# Altium PCB Current_Transducer.PcbDoc
Units mm, origin at the board's own origin, x right, y up, seen from the top; angles counter-clockwise.
Board outline 230 x 35 mm, 2 copper layers (Top Layer, Bottom Layer); 44 components, 17 nets, 113 pads, 2 vias.
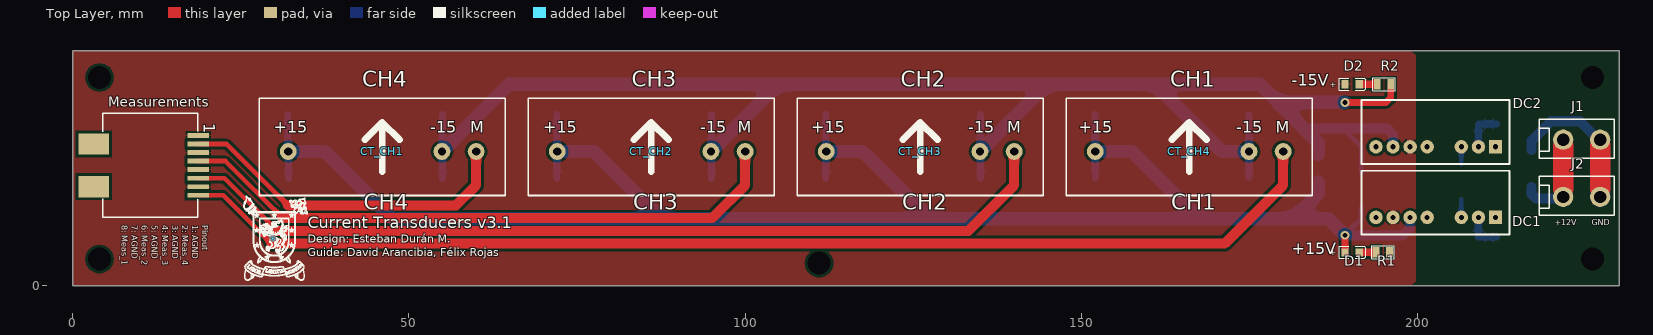
[diagram p0: Top Layer view]
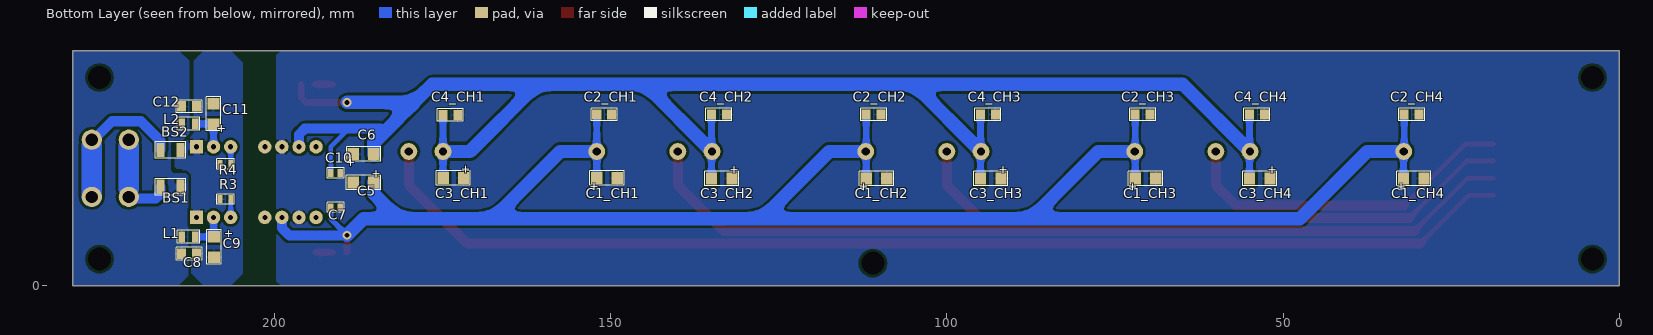
[diagram p1: Bottom Layer view, seen from below]
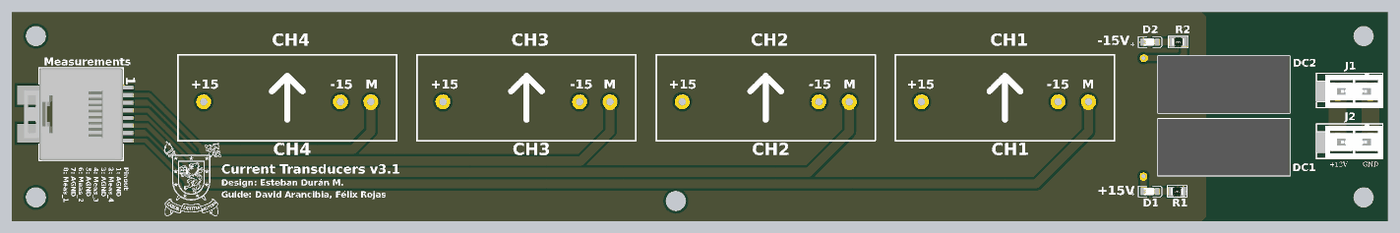
[diagram p2: 3D render of the assembled board from above, using the file's embedded part models]
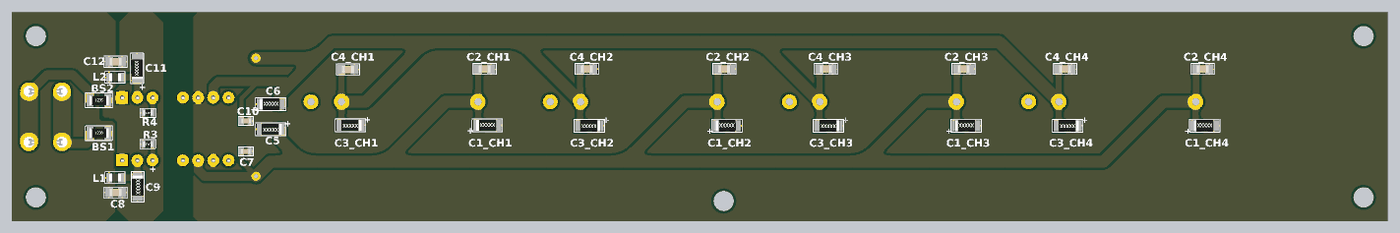
[diagram p3: 3D render of the assembled board from below, using the file's embedded part models]

## Layer stack, top to bottom
Top Solder: solder mask 0.0102, Solder Resist, Dk 3.5
Top Layer: signal copper 0.0356
Dielectric1: dielectric 0.32, FR-4, Dk 4.8
Bottom Layer: signal copper 0.0356
Bottom Solder: solder mask 0.0102, Solder Resist, Dk 3.5

## Board outline
230,35 230,0 0,0 0,35

## Design rules (kind name [scope] priority, off if disabled: settings)
Clearance [All] p1: gap=0.4
ComponentClearance [All] p1: gap=0.254 collisioncheckmode=3 verticalgap=0 showdistances=FALSE
Height [All] p1: minheight=0 maxheight=50 prefheight=12.7
HoleSize [All] p1: absolutevalues=TRUE maxlimit=100 minlimit=0.025 maxpercent=80.000 minpercent=20.000
PolygonConnect PolygonConnect_1 [All vs HasFootprint('Conector tipo ATX Wurth 2 posiciones') OR HasFootprint('DC/DC 15V 5W') OR HasFootprint('RES_1206')] p1: connectstyle=Relief reliefconductorwidth=1 reliefentries=4 polygonreliefangle="90 Angle" airgapwidth=0.254
PolygonConnect [All] p2: connectstyle=Relief reliefconductorwidth=0.254 reliefentries=4 polygonreliefangle="90 Angle" airgapwidth=0.254
RoutingVias [All] p1: holewidth=0.711 width=1.27 viastyle="Through Hole" minholewidth=0.711 minwidth=1.27 maxholewidth=0.711 maxwidth=1.27
SilkToSilkClearance [All] p1: silktosilkclearance=0
SilkToSolderMaskClearance SilkscreenOverComponentPads [IsPad] p1: minsilkscreentomaskgap=0 clearancetoexposedcopper=TRUE
SolderMaskExpansion [All] p1: expansion=0.102
Width [All] p1: maxlimit=3 minlimit=0.254 preferedwidth=1.5 minimp=50.000000 maximp=50.000000 favimp=50.000000
25 further rules are at their usual default settings.

## Classes and differential pairs
channel class Transducer: CH1 CH2 CH3 CH4 CH5 CH6 CH7 CH8 CH9 CH10
net class MEDICION[1..4]: MEDICION1 MEDICION2 MEDICION3 MEDICION4
component class CH1: C1_CH1 C2_CH1 C3_CH1 C4_CH1 CT_CH1
component class CH2: C1_CH2 C2_CH2 C3_CH2 C4_CH2 CT_CH2
component class CH3: C1_CH3 C2_CH3 C3_CH3 C4_CH3 CT_CH3
component class CH4: C1_CH4 C2_CH4 C3_CH4 C4_CH4 CT_CH4
component class "Current Measurement": * C5 C6 Measurements
component class PowerSupply: BS1 BS2 C7 C8 C9 C10 C11 C12 D1 D2 DC1 DC2 J1 J2 L1 L2 R1 R2 R3 R4

## Components (designator, comment, footprint, x,y, rotation, side; value= is the part's Value field where it differs from the comment)
* "LOGO USACH" "Logo Usach" 29.9,6.8 r0 top
BS1 "Ferrite bead" RES_1206 216.96,14.75 r270 bottom
BS2 "Ferrite bead" RES_1206 216.96,20.25 r270 bottom
C1_CH1 "1uF" "CAP_1206 Tantalio" 150.535,16.06 r90 bottom (schematic designator C1)
C1_CH2 "1uF" "CAP_1206 Tantalio" 110.475,16 r90 bottom (schematic designator C1)
C1_CH3 "1uF" "CAP_1206 Tantalio" 70.475,16 r90 bottom (schematic designator C1)
C1_CH4 "1uF" "CAP_1206 Tantalio" 30.575,16 r90 bottom (schematic designator C1)
C2_CH1 "100nF" CAP_0805 152.06,25.5 r90 bottom (schematic designator C2)
C2_CH2 "100nF" CAP_0805 112,25.5 r90 bottom (schematic designator C2)
C2_CH3 "100nF" CAP_0805 72,25.5 r90 bottom (schematic designator C2)
C2_CH4 "100nF" CAP_0805 32,25.5 r90 bottom (schematic designator C2)
C3_CH1 "1uF" "CAP_1206 Tantalio" 173.395,16.08 r270 bottom (schematic designator C3)
C3_CH2 "1uF" "CAP_1206 Tantalio" 133.475,16 r270 bottom (schematic designator C3)
C3_CH3 "1uF" "CAP_1206 Tantalio" 93.475,16 r270 bottom (schematic designator C3)
C3_CH4 "1uF" "CAP_1206 Tantalio" 53.475,16 r270 bottom (schematic designator C3)
C4_CH1 "100nF" CAP_0805 172.72,25.42 r270 bottom (schematic designator C4)
C4_CH2 "100nF" CAP_0805 132.8,25.5 r270 bottom (schematic designator C4)
C4_CH3 "100nF" CAP_0805 92.8,25.5 r270 bottom (schematic designator C4)
C4_CH4 "100nF" CAP_0805 52.8,25.5 r270 bottom (schematic designator C4)
C5 "10uF" "CAP_1206 Tantalio" 186.725,15.4 r270 bottom
C6 "10uF" "CAP_1206 Tantalio" 186.725,19.6 r90 bottom
C7 "0.33uF" CAP_0603 191.6,11.7 r90 bottom
C8 "4.7uF" CAP_0805 213.78,4.8 r90 bottom
C9 "2.2uF" "CAP_1206 Tantalio" 208.98,5.8 r180 bottom
C10 "0.33uF" CAP_0603 190.2,16.8 r270 bottom
C11 "2.2uF" "CAP_1206 Tantalio" 209.08,25.6 r0 bottom
C12 "4.7uF" CAP_0805 213.78,26.7 r90 bottom
CT_CH1 "Current Sensor 50A 1 Channel Hall Effect, Closed Loop Bidirectional Module" "LEM_LA 55-P" 60,20 r180 top (schematic designator CT)
CT_CH2 "Current Sensor 50A 1 Channel Hall Effect, Closed Loop Bidirectional Module" "LEM_LA 55-P" 100,20 r180 top (schematic designator CT)
CT_CH3 "Current Sensor 50A 1 Channel Hall Effect, Closed Loop Bidirectional Module" "LEM_LA 55-P" 140,20 r180 top (schematic designator CT)
CT_CH4 "Current Sensor 50A 1 Channel Hall Effect, Closed Loop Bidirectional Module" "LEM_LA 55-P" 180,20 r180 top (schematic designator CT)
D1 "LED" LED_0805_GREEN 190.25,5 r0 top
D2 "LED" LED_0805_GREEN 190.25,30 r0 top
DC1 "MEAN WELL USA" "DC/DC 15V 5W" 211.58,10.2 r180 top
DC2 "MEAN WELL USA" "DC/DC 15V 5W" 211.58,20.7 r180 top
J1 "Conector tipo ATX 2pos_1" "Conector tipo ATX Wurth 2 posiciones - (5.5mm)" 224.4,21.75 r270 top
J2 "Conector tipo ATX 2pos_1" "Conector tipo ATX Wurth 2 posiciones - (5.5mm)" 224.4,13.25 r270 top
L1 "12uH" INDUCTOR_0805 214.45,8.27 r90 bottom
L2 "12uH" INDUCTOR_0805 214.45,25.07 r90 bottom
Measurements "RJ-45 Modulo" "RJ45 1 Modulo SMD" 18.7,22.39 r270 top
R1 "5.6K" RES_0805 195.825,5 r270 top
R2 "5.6K" RES_0805 194,30 r90 top
R3 "DNP" RES_0603 206.48,12.9 r270 bottom
R4 "DNP" RES_0603 206.48,18.15 r270 bottom

## Footprints (in the part's own frame and the unit in brackets; to place one, negate y for a bottom-side part, rotate by r counter-clockwise, add the part's x,y. Pads: shape width x height; smd on the part's side, far side on the other; paste and mask are expansions set on the pad)
CAP_0603 [mm] "CAP CER 0603"
  rect 1.2x0.8 smd: 1(0,0) 2(0,-1.4)
  silkscreen extent -0.76,-1.96 0.76,0.56, body extent -0.39,-1.45 0.41,0.15, height 0.4
CAP_0805 [mm] "CAP CER 0805"
  rect 1.55x1.35 smd: 1(0,0) 2(0,-2.2)
  silkscreen extent -0.94,-3.04 0.94,0.84, body extent -0.62,-2.1 0.63,-0.1, height 0.6
"CAP_1206 Tantalio" [mm] "Case A"
  rect 1.8x1.7 smd: 1(0,1.525) 2(0,-1.525)
  silkscreen extent -1.07,-2.55 1.08,2.54, body extent -0.95,-1.53 0.95,1.88, height 1.84
"Conector tipo ATX Wurth 2 posiciones - (5.5mm)" [mm] "Vertical Pitch 5.5 mm (64900221122)"
  round 3 hole 1.8: 1(0,2.75) 2(0,-2.75)
  silkscreen extent -3.05,-6.3 2.75,4.8, body extent -3.05,-6.3 2.75,4.8, height 12.9
"DC/DC 15V 5W" [mm] "Marca MEAN WELL (SPB05A-15)"
  rect 2x2 hole 0.762: 1(0,0)
  round 2 hole 0.762: 2(2.54,0) 3(5.08,0) 6(12.7,0) 7(15.24,0) ""(10.16,0) ""(17.78,0)
  silkscreen extent -2.07,-6.95 19.93,2.55, body extent -2.07,-6.95 19.93,2.55, height 12.3
INDUCTOR_0805 [mm] "Wurth"
  rect 1.6x1 smd: 1(-0.97,-0.67) 2(-0.97,-2.67)
  silkscreen extent -1.94,-3.33 0,0, body extent -1.57,-2.67 -0.37,-0.67, height 1
LED_0805_GREEN [mm] "Chip LED, 2-Leads, Body 2.0x1.3mm, IPC Medium Density"
  rect 1.1x1.2 smd: 1(-1.05,0) 2(1.05,0)
  silkscreen extent -1.91,-0.89 2.03,0.89, body extent -1,-0.63 1,0.62, height 0.68
"LEM_LA 55-P" [mm] "SENSOR CURRENT 50A TH"
  round 2.5 hole 1.25: 1(0,0) 2(5.08,0) 3(27.94,0)
  silkscreen extent -4.33,-7.9 32.27,6.55, body extent -4.33,-7.9 32.27,6.55, height 27.2
"Logo Usach" [mm] "9.5 x 12.6 mm"
  silkscreen extent -4.53,-5.94 5.09,6.59
RES_0603 [mm] "RES 0603"
  rect 1.2x0.7 smd: 1(0,0) 2(0,-1.6)
  silkscreen extent -0.76,-2.11 0.76,0.51, body extent -0.45,-1.59 0.45,0.01, height 0.5
RES_0805 [mm] "RES 0805"
  rect 1.6x1 smd: 1(0,0) 2(0,-2)
  silkscreen extent -0.97,-2.66 0.97,0.67, body extent -0.61,-2 0.64,0, height 0.5
RES_1206 [mm] "RES 1206"
  rect 2.1x1.2 smd: 1(0,0) 2(0,3)
  silkscreen extent -1.22,-0.76 1.22,3.76, body extent -0.78,-0.1 0.82,3.1, height 0.6
"RJ45 1 Modulo SMD" [mm] "smd WURTH"
  rect 0.7x3.2 smd: 1(0,0) 2(1.27,0) 3(2.54,0) 4(3.81,0) 5(5.08,0) 6(6.35,0) 7(7.62,0) 8(8.89,0)
  rect 3.15x4.5 smd: ""(1.27,-15.55) ""(7.62,-15.55)
  silkscreen extent -3.31,-14.2 12.2,-0.1, body extent -3.32,-16.64 12.23,1.36, height 12.7

## Part data
BS1 BS2: library part Bead, "4A"
C1_CH1 C1_CH2 C1_CH3 C1_CH4 C3_CH1 C3_CH2 C3_CH3 C3_CH4 C5 C6 C9 C11: library part "Cap Tantalio 1206", "Capacitor Tantalio"
C2_CH1 C2_CH2 C2_CH3 C2_CH4 C4_CH1 C4_CH2 C4_CH3 C4_CH4: library part CAP_0805, "Capacitor"
C7 C10: library part Cap_0603, "Capacitor Ceramic"
C8 C12: library part Cap_0805, "Capacitor"
CT_CH1 CT_CH2 CT_CH3 CT_CH4: library part "LEM_LA 55-P", "LA 55-P"
D1 D2: library part LED2, "LED Magenta"
DC1 DC2: library part "DC/DC +12V a +15V 5W", "Isolated Module DC DC Converter 1 Output 15V 333mA 9V - 18V Input"
J1 J2: "CONN HEADER VERT 2POS 5.5MM"
L1 L2: library part Inductor_0805, "200mA"
Measurements: library part "RJ45 1 modulo SMD", "Modulo RJ-45 vertical SMD"
R1 R2: library part Res0805
R3 R4: library part Res0603

## Free pads (board coordinates)
  round 3 hole 3.4 unplated: ""(4,4) ""(4,31) ""(111,3.4) ""(226,4) ""(226,31)

## Via types
v1: diameter 1.3, hole 0.7, Top Layer to Bottom Layer, 2 vias

## Nets (pads, with @x,y where several pads share a name; then routed paths per layer and width w, separated by ;. In a path a pad name is that pad's centre, name@x,y a point inside that pad or via, vN(x,y) a via of type N, cw(c..) or ccw(c..) an arc to the next point about the centre after c; other vN are vias at no path point)
+12V: BS1.1 J1.2 J2.2 | length 19.1
  Top Layer w3: J2.2@221.65,14.4 J1.2@221.65,20.9
  Bottom Layer w1.5: BS1.1 216.96,13.64 217.6,13 J2.2@221.65,13
  Bottom Layer w3: J2.2@221.65,14.4 J1.2@221.65,20.9
+12V_FILTERED: BS1.2 C8.1 C12.1 L1.1 L2.1
+15V: C1_CH1.1 C1_CH2.1 C1_CH3.1 C1_CH4.1 C2_CH1.1 C2_CH2.1 C2_CH3.1 C2_CH4.1 C5.1 C7.1 CT_CH1.3 CT_CH2.3 CT_CH3.3 CT_CH4.3 D1.1 DC1.6 | length 285.5
  Top Layer w1: D1.1 v1(189.2,7.55)
  Bottom Layer w0.7: v1(189.2,7.55) 191.6,9.95 C7.1
  Bottom Layer w1: C2_CH4.1 32,20.06 CT_CH1.3 32.1,19.96 C1_CH4.1 ; C1_CH3.1 72,19.94 CT_CH2.3 72,20.06 C2_CH3.1 ; C1_CH2.1 112,19.94 CT_CH3.3 112,20.06 C2_CH2.1 ; C2_CH1.1@152,25.5 152.06,25.44 CT_CH4.3 C1_CH1.1
  Bottom Layer w1.5: v1(189.2,7.55) 189.25,7.5 197.78,7.5 198.88,8.6 DC1.6
  Bottom Layer w2: CT_CH1.3 37.5,20 47.5,10 87.5,10 ; CT_CH2.3 77.5,20 87.5,10 ; CT_CH3.3 117.5,20 127.5,10 ; CT_CH4.3 157.5,20 167.5,10 ; C5.1 185.2,13.7 181.5,10 ; v1(189.2,7.55) 186.75,10 181.5,10 ; 87.5,10 127.5,10 ; 127.5,10 167.5,10 ; 167.5,10 181.5,10
-15V: C3_CH1.2 C3_CH2.2 C3_CH3.2 C3_CH4.2 C4_CH1.2 C4_CH2.2 C4_CH3.2 C4_CH4.2 C6.2 C10.2 CT_CH1.2 CT_CH2.2 CT_CH3.2 CT_CH4.2 DC2.7 R2.2 | length 265.2
  Top Layer w1: v1(189.2,27.3) 195.3,27.3 196,28 R2.2
  Bottom Layer w0.7: 189.28,23 191.6,20.68 C10.2
  Bottom Layer w1: CT_CH1.2 55,19.92 C3_CH4.2 ; CT_CH1.2@55,20.08 C4_CH4.2 ; CT_CH2.2 95,19.92 C3_CH3.2 ; CT_CH2.2@95,20.08 C4_CH3.2 ; CT_CH3.2 135,19.92 C3_CH2.2 ; CT_CH3.2@135,20.08 C4_CH2.2 ; C3_CH1.2 CT_CH4.2 C4_CH1.2
  Bottom Layer w1.5: 183.68,22.82 184.26,23.4 195.48,23.4 196.34,22.54 DC2.7
  Bottom Layer w2: CT_CH1.2 55,20.08 64.92,30 104.92,30 ; CT_CH2.2 95,20.08 104.92,30 ; CT_CH3.2 135,20.08 144.92,30 ; CT_CH4.2 170.92,20 160.92,30 ; C6.2 185.2,21.3 183.68,22.82 179.2,27.3 ; v1(189.2,27.3) 179.2,27.3 ; 104.92,30 144.92,30 ; 144.92,30 160.92,30 ; 160.92,30 176.5,30 179.2,27.3
AGND: C1_CH1.2 C1_CH2.2 C1_CH3.2 C1_CH4.2 C2_CH1.2 C2_CH2.2 C2_CH3.2 C2_CH4.2 C3_CH1.1 C3_CH2.1 C3_CH3.1 C3_CH4.1 C4_CH1.1 C4_CH2.1 C4_CH3.1 C4_CH4.1 C5.2 C6.1 C7.2 C10.1 D2.1 DC1.7 DC2.6 Measurements.1 Measurements.3 Measurements.5 Measurements.7 R1.1
GND: BS2.1 J1.1 J2.1 | length 28.1
  Top Layer w3: J2.1@227.15,14.4 J1.1@227.15,20.9
  Bottom Layer w1.5: BS2.1 216.96,21.606 219.854,24.5 224.15,24.5 J1.1@227.15,21.5
  Bottom Layer w3: J2.1 J1.1@227.15,20.9
GND_FILTERED: BS2.2 C8.2 C9.2 C11.2 C12.2 DC1.1 DC2.1 R3.2 R4.2
MEDICION1: CT_CH1.1 Measurements.2 | length 51.3
  Top Layer w0.7: Measurements.2 22.88,21.12 32,12
  Top Layer w1.5: 32,12 57,12 60,15 CT_CH1.1
MEDICION2: CT_CH2.1 Measurements.4 | length 91.8
  Top Layer w0.7: Measurements.4 22.733,18.58 31.213,10.1
  Top Layer w1.5: 31.213,10.1 95.1,10.1 100,15 CT_CH2.1
MEDICION3: CT_CH3.1 Measurements.6 | length 132.4
  Top Layer w0.7: Measurements.6 22.586,16.04 30.426,8.2
  Top Layer w1.5: 30.426,8.2 133.2,8.2 140,15 CT_CH3.1
MEDICION4: CT_CH4.1 Measurements.8 | length 172.9
  Top Layer w0.7: Measurements.8 22.38,13.5 29.58,6.3
  Top Layer w1.5: 29.58,6.3 171.3,6.3 180,15 CT_CH4.1
NetC9_1: C9.1 DC1.2 L1.2 | length 5.7
  Bottom Layer w1: DC1.2 209.04,7.385 C9.1 209.005,7.3 L1.2
NetC11_1: C11.1 DC2.2 L2.2 | length 6.1
  Bottom Layer w1: DC2.2 209.04,24.035 C11.1 209.105,24.1 L2.2
NetD1_2: D1.2 R1.2 | length 2.5
  Top Layer w1: D1.2 R1.2
NetD2_2: D2.2 R2.1 | length 2.7
  Top Layer w1: D2.2 R2.1
NetDC1_3: DC1.3 R3.1 | length 2.7
  Bottom Layer w0.7: R3.1 206.48,10.22 DC1.3
NetDC2_3: DC2.3 R4.1 | length 2.6
  Bottom Layer w0.7: R4.1 206.48,20.68 DC2.3
pads on no net: DC1. DC2. Measurements.

## Polygon pours and split planes (outlines as drawn)
AGND on Top Layer "Top Layer-GND" (solid, pour order 9): 0,35 0,0 199,0 199.7,0.7 199.7,34.3 199,35
AGND on Bottom Layer "Bottom Layer" (solid, pour order 16): 0,35 0,0 199,0 199.7,0.7 199.7,34.3 199,35
+12V_FILTERED on Bottom Layer "12V_filtered" (solid, pour order 24): 212.68,27.3 212.68,22.62 213.3,22 213.8,21.5 215.1,21.5 215.4,21.2 215.4,17.2 215,16.8 214.5,16.8 213.2,16.8 212.8,16.4 212.8,1.5 214.3,0 230,0 230,35 214.2,35 212.68,33.48
GND_FILTERED on Bottom Layer "GND_filtered" (solid, pour order 26): 206.5,35 204.7,33.2 204.7,1.8 206.5,0 210.5,0 212.5,2 212.5,16.12 213.78,17.4 214.48,17.4 214.78,17.7 214.78,21.4 213.28,21.4 211.98,22.7 211.98,33.52 210.5,35

## Silkscreen, mask and mechanical layers (free items; w line width, h text height)
Top Overlay:
  text "-15V" at 181.3,29.2 h3
  text "CH4" at 43.1,28.8 h4
  text "CH3" at 83.133,28.8 h4
  text "CH2" at 123.167,28.8 h4
  text "CH1" at 163.2,28.8 h4
  text "CH4" at 43.3,10.5 h4
  text "CH3" at 83.333,10.5 h4
  text "CH2" at 123.367,10.5 h4
  text "CH1" at 163.4,10.5 h4
  text "Pinout / 1: AGND / 2: Meas_4 / 3: AGND / 4: Meas_3 / 5: AGND / 6: Meas_2 / 7: AGND / 8: Meas_1" at 7,9 h1.5 r270
  text "+12V" at 220.4,8.7 h1.52
  text "GND" at 225.9,8.7 h1.52
  text "Current Transducers v3.1" at 35,8 h3
  text "Design: Esteban Durán M." at 35,6 h2
  text "+15V" at 181.3,4.1 h3
  text "Guide: David Arancibia, Félix Rojas" at 35,4 h2
Mechanical 1:
  lines w0.5: 0,0 49.5,0 230,0 230,35 0,35 0,0

## Dimensions
0,35 to 230,35 on Mechanical 1
230,35 to 230,0 on Mechanical 1

## Text inside footprints (layer, text, board x,y; h text height)
C1_CH1: Bottom Overlay "+" at 151.455,14.1 h2 r270
C1_CH2: Bottom Overlay "+" at 111.395,14.04 h2 r270
C1_CH3: Bottom Overlay "+" at 71.395,14.04 h2 r270
C1_CH4: Bottom Overlay "+" at 31.495,14.04 h2 r270
C3_CH1: Bottom Overlay "+" at 172.475,18.04 h2 r90
C3_CH2: Bottom Overlay "+" at 132.555,17.96 h2 r90
C3_CH3: Bottom Overlay "+" at 92.555,17.96 h2 r90
C3_CH4: Bottom Overlay "+" at 52.555,17.96 h2 r90
C5: Bottom Overlay "+" at 185.805,17.36 h2 r90
C6: Bottom Overlay "+" at 187.645,17.64 h2 r270
C9: Bottom Overlay "+" at 207.48,6.8 h2
C11: Bottom Overlay "+" at 207.18,24.325 h2 r180
CT_CH1: Top Overlay "+15" at 29.9,22.2 h3; Top Overlay "-15" at 53.2,22.2 h3; Top Overlay "M" at 59.1,22.212 h3
CT_CH2: Top Overlay "M" at 98.9,22.212 h3; Top Overlay "-15" at 93.3,22.2 h3; Top Overlay "+15" at 70,22.2 h3
CT_CH3: Top Overlay "+15" at 109.8,22.2 h3; Top Overlay "-15" at 133.2,22.2 h3; Top Overlay "M" at 139,22.212 h3
CT_CH4: Top Overlay "M" at 178.9,22.212 h3; Top Overlay "-15" at 173,22.2 h3; Top Overlay "+15" at 149.6,22.2 h3
D1: Top Overlay "+" at 186.95,4.26 h1.52
D2: Top Overlay "+" at 186.95,29.26 h1.52
Measurements: Top Overlay "1" at 18.9,24.19 h3 r270